# Altium PCB AT_32_PCB.PcbDoc
Units mm, origin at the board's own origin, x right, y up, seen from the top; angles counter-clockwise.
Board outline 100 x 100 mm, 2 copper layers (Top Layer, Bottom Layer); 63 components, 54 nets, 231 pads, 0 vias.
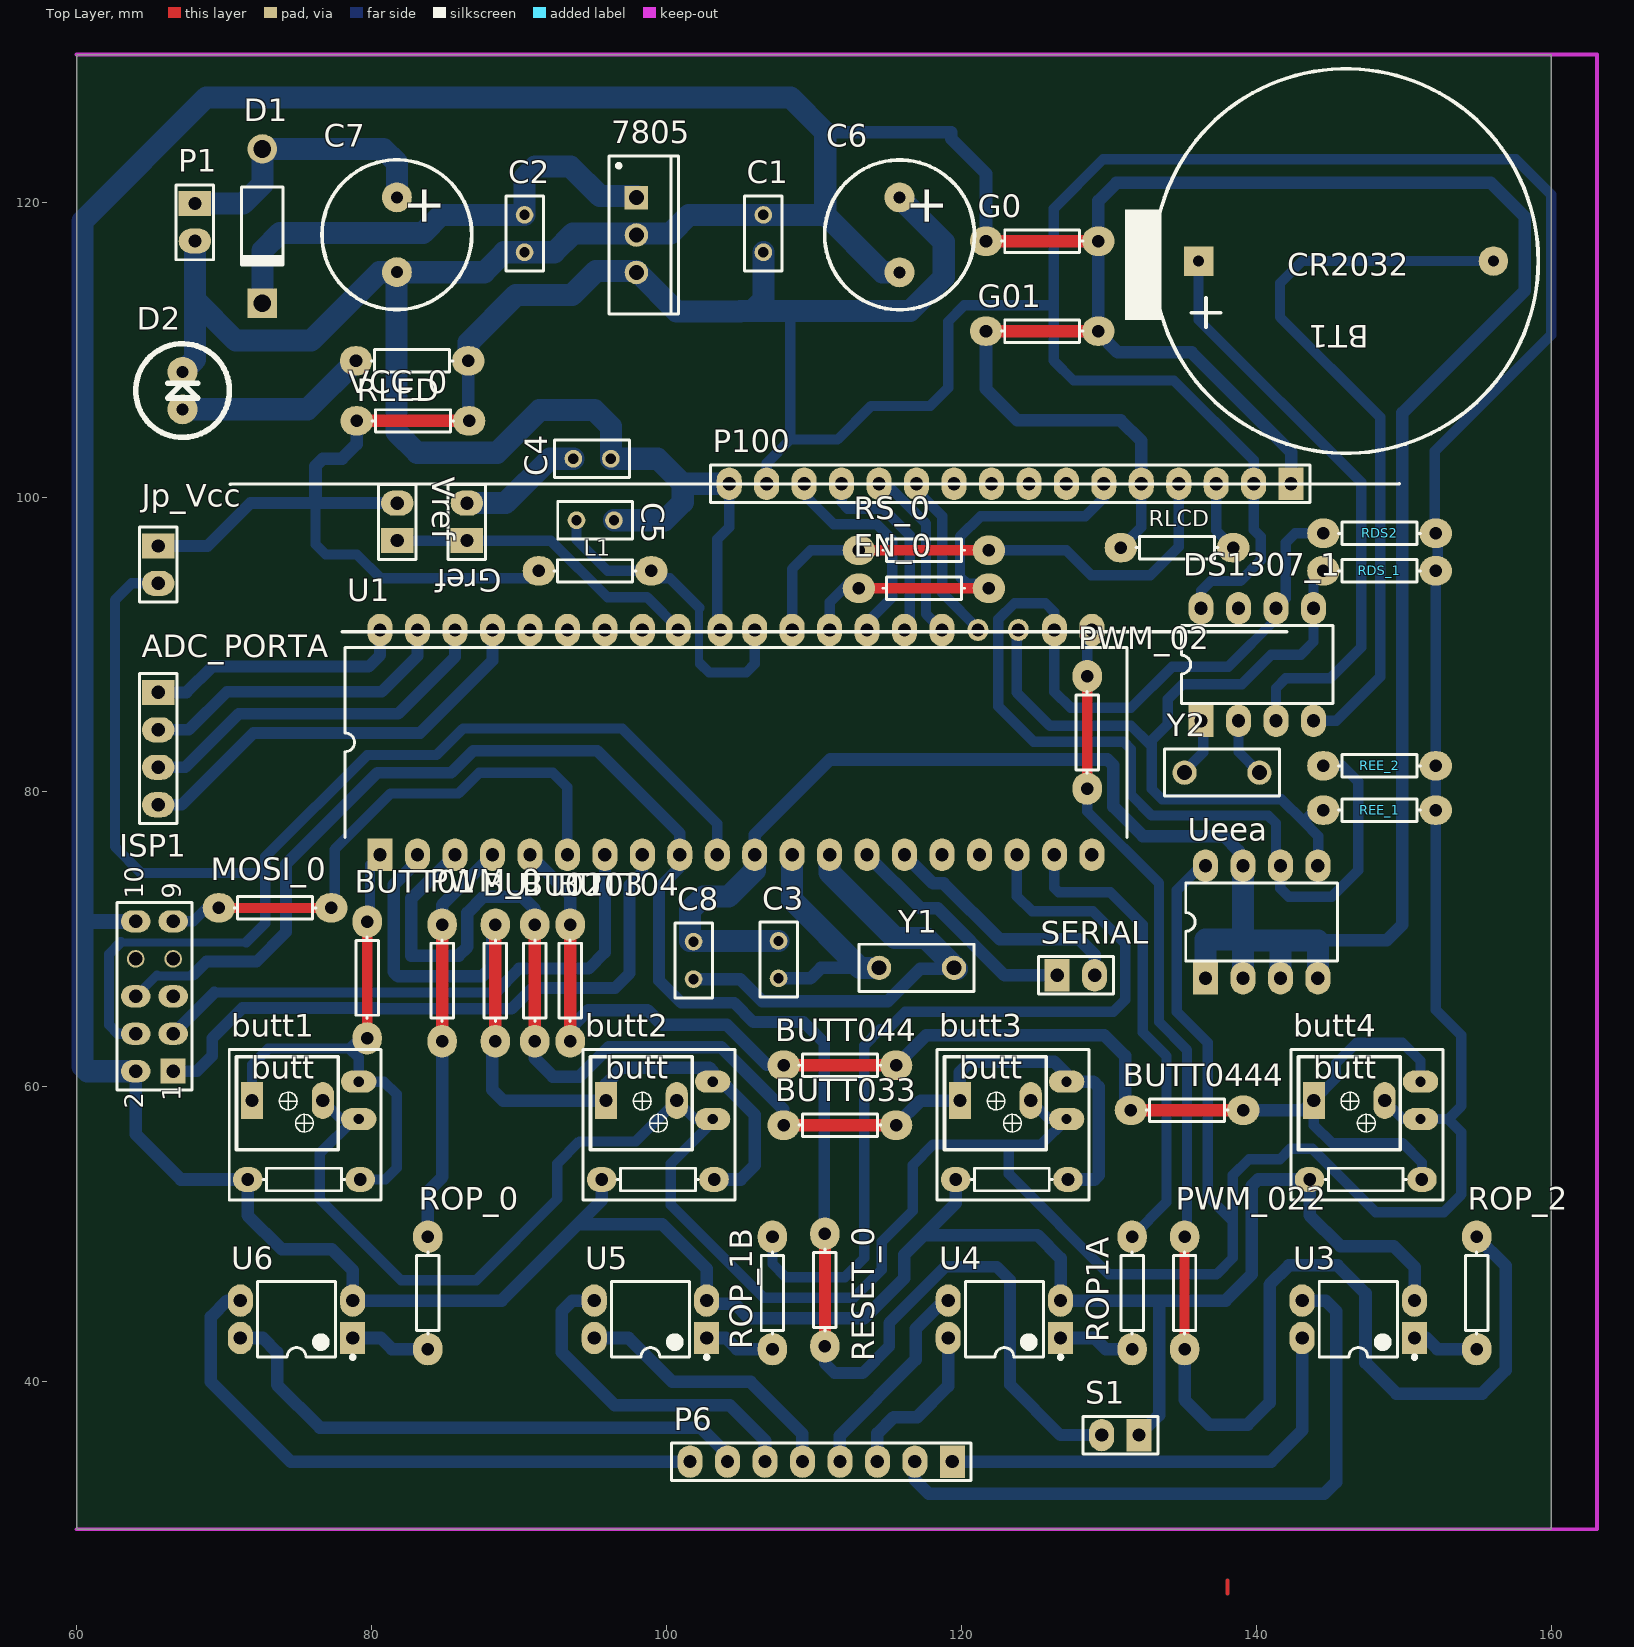
[diagram p0: Top Layer view]
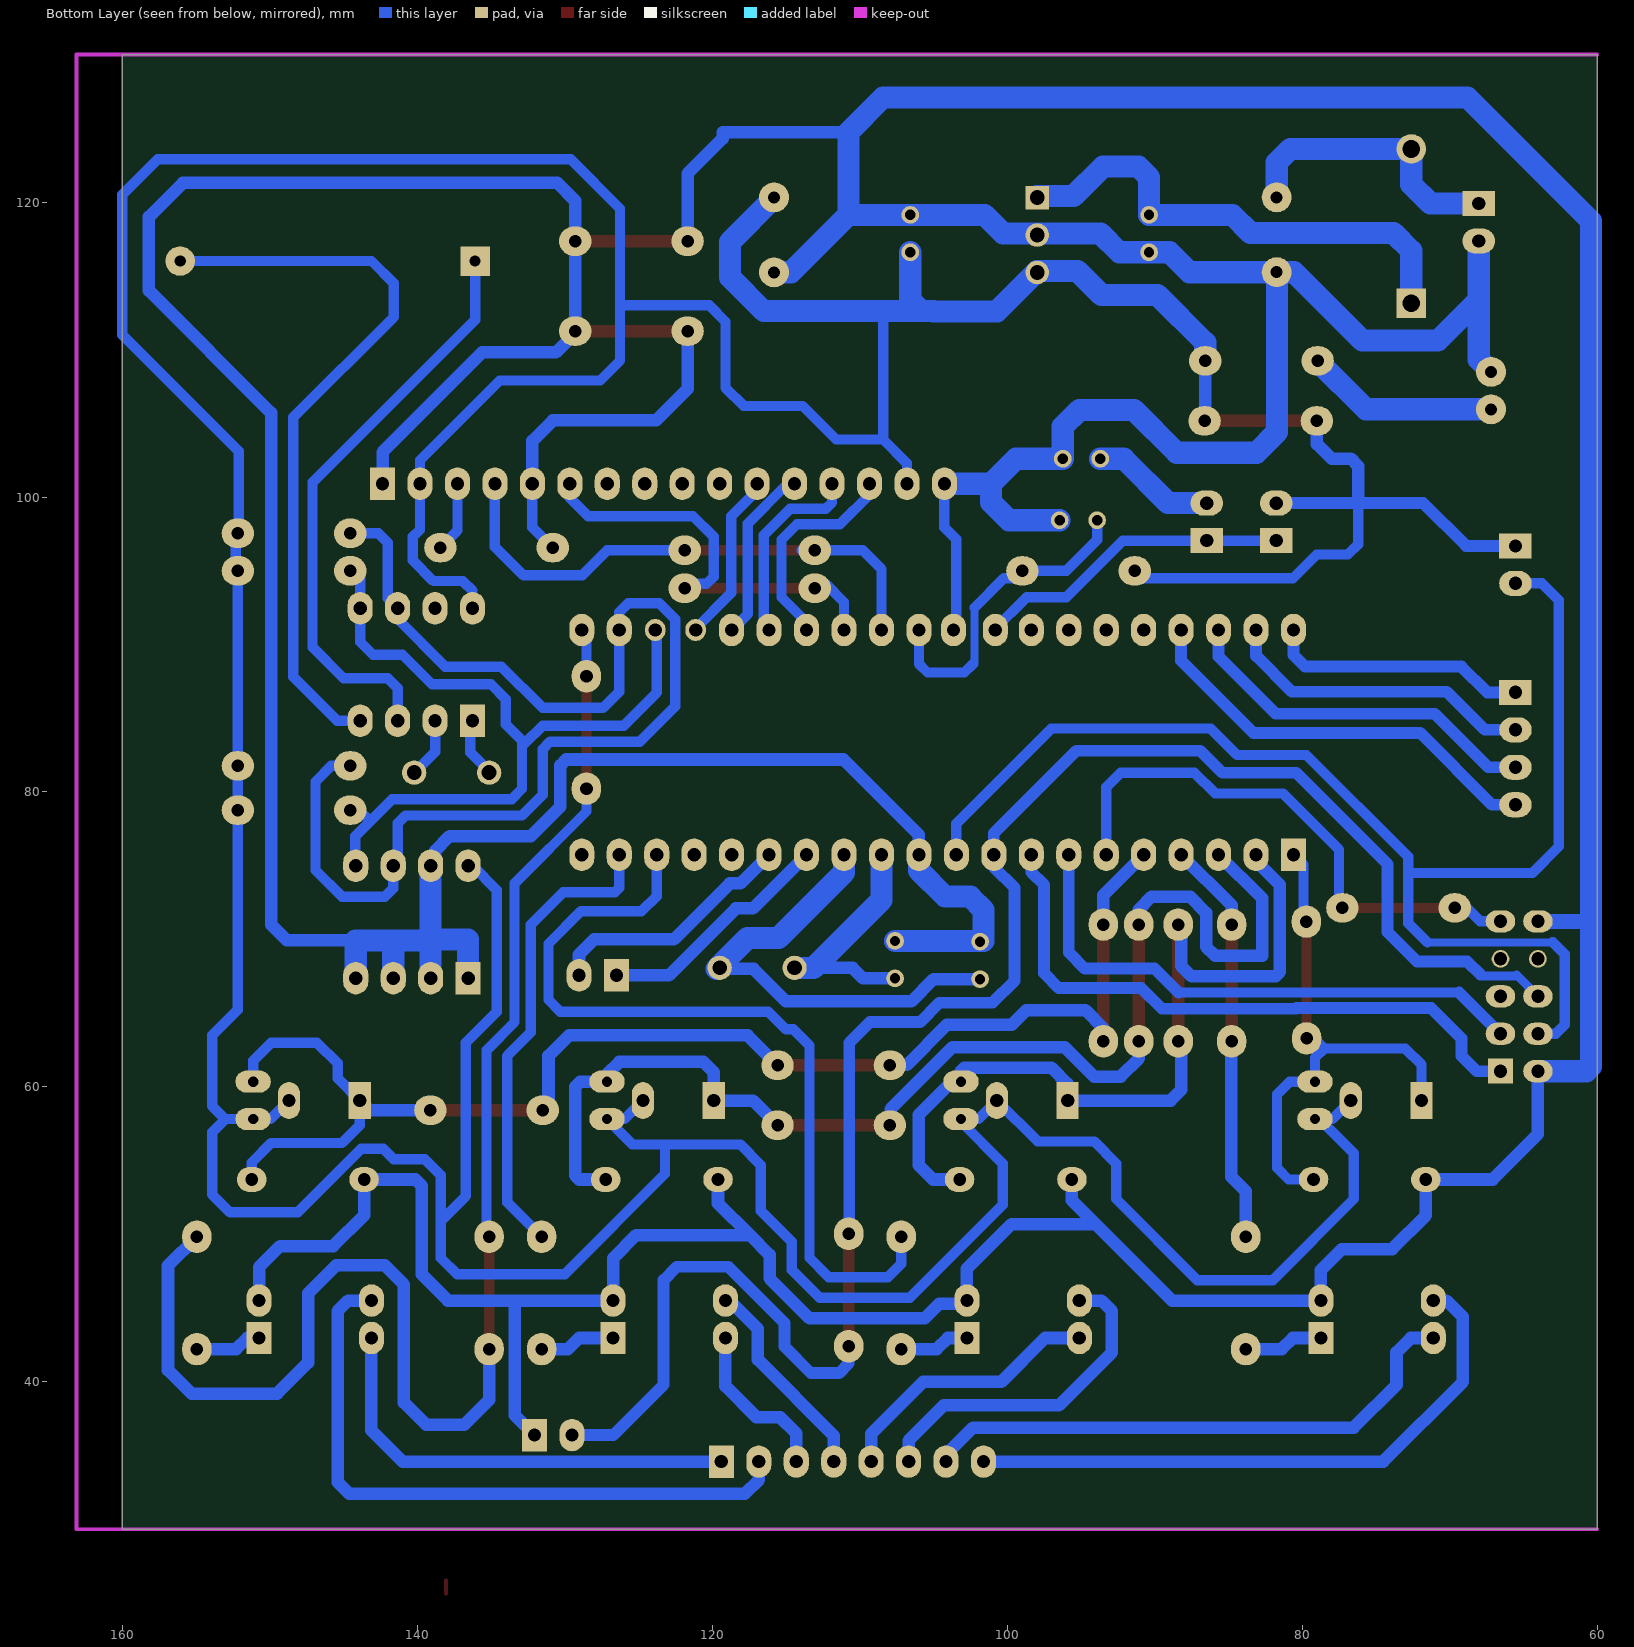
[diagram p1: Bottom Layer view, seen from below]

## Layer stack, top to bottom
Top Layer: signal copper 0.0356
Dielectric: dielectric 0.32, FR-4, Dk 4.8
Bottom Layer: signal copper 0.0356

## Board outline
160,130 160,30 60,30 60,130 160,130

## Design rules (kind name [scope] priority, off if disabled: settings)
Clearance [All] p1: gap=0.254
PolygonConnect [All] p1: connectstyle=Relief reliefconductorwidth=0.254 reliefentries=4 polygonreliefangle="90 Angle"
RoomDefinition AT32 [InComponentClass('AT32')] p1: confinementstyle=ConfineIn formatcopy=TRUE lockcomponents=FALSE outline 161.2,29 173.7,29 173.7,41.1 161.2,41.1
RoutingLayers [All] p1: top layer_v5=FALSE bottom layer_v5=TRUE
RoutingVias [All] p1: holewidth=0.711 width=1.27 viastyle="Through Hole" minholewidth=0.711 minwidth=1.27 maxholewidth=0.711 maxwidth=1.27
SilkscreenOverComponentPads [All] p1: minsilkscreentomaskgap=0.254
SolderMaskExpansion [All] p1: expansion=0.102
Width [All] p1: maxlimit=2 minlimit=0.5 preferedwidth=0.8
26 further rules are at their usual default settings.

## Components (designator, comment, footprint, x,y, rotation, side; value= is the part's Value field where it differs from the comment)
7805 "LM78M05CT" T03B 97.964,117.764 r270 top
ADC_PORTA "Header 4" HDR1X4 65.532,86.752 r270 top
BT1 "Battery" BATT 144.812,115.824 r270 top
butt1 "sch_butt" pcb_butt 58.452,62.04 r0 top
BUTT01 "Res1" AXIAL-0.3#1 79.704,67.4 r90 top
butt2 "sch_butt" pcb_butt 82.452,62.04 r0 top
BUTT02 "Res1" AXIAL-0.3#2 88.4,67.2 r90 top
butt3 "sch_butt" pcb_butt 106.452,62.04 r0 top
BUTT03 "Res1" AXIAL-0.3#2 91.072,67.2 r90 top
butt4 "sch_butt" pcb_butt 130.452,62.04 r0 top
BUTT04 "Res1" AXIAL-0.3#2 93.472,67.2 r90 top
BUTT033 "Res1" AXIAL-0.3#3 111.76,57.404 r180 top
BUTT044 "Res1" AXIAL-0.3#3 111.76,61.468 r180 top
BUTT0444 "Res1" AXIAL-0.3#3 135.3,58.42 r180 top
C1 "Cap" RAD-0.1 106.568,117.864 r270 top
C2 "Cap" RAD-0.1 90.376,117.864 r90 top
C3 "Cap" RAD-0.1 107.6,68.628 r90 top
C4 "Cap" RAD-0.1 94.956,102.596 r0 top
C5 "Cap" RAD-0.1 95.168,98.423 r180 top
C6 "Cap Pol1" C_+ 115.824,117.856 r180 top
C7 "Cap Pol1" C_+ 81.74,117.864 r180 top
C8 "Cap" RAD-0.1 101.836,68.58 r90 top
D1 "Diode 1N4007" DIO10.46-5.3x2.8 72.596,118.372 r270 top
D2 "LED0" LED0 67.24,107.096 r0 top
DS1307_1 "DS1307" DIP8 140.059,88.64 r0 top
EN_0 "Res1" AXIAL-0.3#4 117.456,93.812 r180 top
G0 "Res1" AXIAL-0.3#3 125.476,117.348 r180 top
G01 "Res1" AXIAL-0.3#3 125.476,111.252 r180 top
Gref "Header 2" HDR1X2 86.468,97.044 r90 top
ISP1 "Header 5X2" HDR2X5 66.548,61.064 r90 top
Jp_Vcc "Header 2" HDR1X2 65.532,96.684 r270 top
L1 "Inductor" AXIAL-0.3#3 95.156,94.984 r0 top
MOSI_0 "Res1" AXIAL-0.3#3 73.46,72.136 r180 top
P1 "Header 2" HDR1X2 68.024,119.896 r270 top
P6 "Header 8" HDR1X8 119.38,34.592 r180 top
P100 "Header 16" HDR1X16 142.354,100.9 r180 top
PWM_0 "Res1" AXIAL-0.3#2 84.784,67.2 r90 top
PWM_02 "Res1" AXIAL-0.3#3 128.524,84.036 r90 top
PWM_022 "Res1" AXIAL-0.3#3 135.128,46.028 r90 top
RDS2 "Res1" AXIAL-0.3#3 148.352,97.536 r0 top
RDS_1 "Res1" AXIAL-0.3#3 148.352,94.996 r180 top
REE_1 "Res1" AXIAL-0.3#3 148.352,78.768 r0 top
REE_2 "Res1" AXIAL-0.3#3 148.352,81.768 r0 top
RESET_0 "Res1" AXIAL-0.3#3 110.744,46.228 r90 top
RLCD "Res1" AXIAL-0.3#3 134.62,96.568 r180 top
RLED "Res1" AXIAL-0.3#3 82.756,109.228 r0 top
ROP1A "Res1" AXIAL-0.3#3 131.572,46.028 r270 top
ROP_0 "Res1" AXIAL-0.3#3 83.82,46.028 r270 top
ROP_1B "Res1" AXIAL-0.3#3 107.188,46.028 r270 top
ROP_2 "Res1" AXIAL-0.3#3 154.94,46.028 r90 top
RS_0 "Res1" AXIAL-0.3#4 117.456,96.388 r180 top
S1 "SW-PB" HDR1X2 132.048,36.392 r180 top
SERIAL "Header 2" HDR1X2 126.492,67.564 r0 top
U1 "ATmega32L-8PI" 40P6 104.712,83.36 r0 top
U3 "Optoisolator1" DIP-4 146.914,44.244 r180 top
U4 "Optoisolator1" DIP-4 122.914,44.244 r180 top
U5 "Optoisolator1" DIP-4 98.914,44.244 r180 top
U6 "Optoisolator1" DIP-4 74.914,44.244 r180 top
Ueea "AT17C65-10PC" 8P3 140.359,71.184 r0 top
VCC_0 "Res1" AXIAL-0.3#3 82.804,105.156 r180 top
Vref "Header 2" HDR1X2 81.752,97.044 r90 top
Y1 "XTAL" CAPR5.08-7.8x3.2 116.956,68.072 r0 top
Y2 "XTAL" CAPR5.08-7.8x3.2 137.668,81.312 r0 top

## Footprints (in the part's own frame and the unit in brackets; to place one, negate y for a bottom-side part, rotate by r counter-clockwise, add the part's x,y. Pads: shape width x height; smd on the part's side, far side on the other; paste and mask are expansions set on the pad)
8P3 [mm] "DIP; 8 Leads; Row Spacing 7.62 mm; Pitch 2.54 mm"
  rect 1.7x2.2 hole 0.9: 1(-3.81,-3.81)
  oval 1.7x2.2 hole 0.9: 2(-1.27,-3.81) 3(1.27,-3.81) 4(3.81,-3.81) 5(3.81,3.81) 6(1.27,3.81) 7(-1.27,3.81) 8(-3.81,3.81)
  silkscreen extent -5.15,-2.65 5.15,2.65
40P6 [mm] "DIP; 40 Leads; Row Spacing 15.24 mm; Pitch 2.54 mm"
  rect 1.7x2.2 hole 0.9: 1(-24.13,-7.62)
  oval 1.7x2.2 hole 0.9: 2(-21.59,-7.62) 3(-19.05,-7.62) 4(-16.51,-7.62) 5(-13.97,-7.62) 6(-11.43,-7.62) 7(-8.89,-7.62) 8(-6.35,-7.62) 9(-3.81,-7.62) 10(-1.27,-7.62) 11(1.27,-7.62) 12(3.81,-7.62) 13(6.35,-7.62) 14(8.89,-7.62) 15(11.43,-7.62) 16(13.97,-7.62) 17(16.51,-7.62) 18(19.05,-7.62) 19(21.59,-7.62) 20(24.13,-7.62) 21(24.13,7.62) 22(21.59,7.62) 25(13.97,7.62) 26(11.43,7.62) 27(8.89,7.62) 28(6.35,7.62) 29(3.81,7.62) 30(1.27,7.62) 31(-1.07,7.62) 32(-3.91,7.62) 33(-6.35,7.62) 34(-8.89,7.62) 35(-11.43,7.62) 36(-13.97,7.62) 37(-16.51,7.62) 38(-19.05,7.62) 39(-21.59,7.62) 40(-24.13,7.62)
  oval 1.4x1.5 hole 0.9: 23(19.15,7.62) 24(16.41,7.62)
  silkscreen extent -26.5,-6.45 26.5,6.45
AXIAL-0.3#1 [mm] "Axial Device, Thru-Hole; 2 Leads; 0.3 in Pin Spacing"
  oval 2.2x2 hole 0.85: 1(-4.11,0.004) 2(3.81,0)
  silkscreen extent -2.77,-0.76 2.77,0.76
AXIAL-0.3#2 [mm] "Axial Device, Thru-Hole; 2 Leads; 0.3 in Pin Spacing"
  oval 2.2x2 hole 0.85: 1(-4.11,0) 2(3.81,0)
  silkscreen extent -2.77,-0.76 2.77,0.76
AXIAL-0.3#3 [mm] "Axial Device, Thru-Hole; 2 Leads; 0.3 in Pin Spacing"
  oval 2.2x2 hole 0.85: 1(-3.81,0) 2(3.81,0)
  silkscreen extent -2.77,-0.76 2.77,0.76
AXIAL-0.3#4 [mm] "Axial Device, Thru-Hole; 2 Leads; 0.3 in Pin Spacing"
  oval 2.2x2 hole 0.85: 1(-4.41,0) 2(4.41,0)
  silkscreen extent -2.77,-0.76 2.77,0.76
BATT [mm]
  rect 2x2 hole 0.762: 0(-0.178,-8.735)
  round 2 hole 0.762: 1(-0.178,11.265)
  silkscreen extent -13.21,-13.74 12.86,14.3
C_+ [mil]
  round 80 hole 32: 1(0.79,-96.85) 2(0.79,103.15)
  silkscreen extent -199,-197 201,203
CAPR5.08-7.8x3.2 [mm] "Capacitor, Ceramic, Thru-Hole, Dipped Radial; Body 7.8 x 3.2 mm (WxT) Pin Spacing 5.08 mm (typ)"
  round 1.65 hole 1: 1(-2.54,0) 2(2.54,0)
  silkscreen extent -3.9,-1.6 3.9,1.6
DIO10.46-5.3x2.8 [mm] "Diode, Axial; Body 5.2 x 2.7 mm (LxDia. max), Lead Dia. 0.86 mm (max)"
  round 2 hole 1.2: 1(-5.23,0)
  rect 2x2 hole 1.2: 2(5.23,0)
  silkscreen extent -2.65,-1.4 2.75,1.4
DIP8 [mm] "DIP; 8 Leads; Row Spacing 7.62 mm; Pitch 2.54 mm"
  rect 1.7x2.2 hole 0.9: 1(-3.81,-3.81)
  oval 1.7x2.2 hole 0.9: 2(-1.27,-3.81) 3(1.27,-3.81) 4(3.81,-3.81) 5(3.81,3.81) 6(1.27,3.81) 7(-1.27,3.81) 8(-3.81,3.81)
  silkscreen extent -5.15,-2.65 5.15,2.65
DIP-4 [mm] "DIP; 4 Leads; Row Spacing 7.62 mm; Pitch 2.54 mm"
  rect 1.7x2.2 hole 0.9: 1(-3.81,1.27)
  oval 1.7x2.2 hole 0.9: 2(-3.81,-1.27) 3(3.81,-1.27) 4(3.81,1.27)
  silkscreen extent -3.94,-2.55 2.65,2.69, body extent -3.15,-2.5 3.15,2.5, height 5.6
HDR1X2 [mm] "Connector; Header; 2 Position"
  rect 1.7x2.2 hole 0.9: 1(0,0)
  oval 1.7x2.2 hole 0.9: 2(2.54,0)
  silkscreen extent -1.27,-1.27 3.81,1.27
HDR1X4 [mm] "Connector; Header; 4 Position"
  rect 1.7x2.2 hole 0.9: 1(0,0)
  oval 1.7x2.2 hole 0.9: 2(2.54,0) 3(5.08,0) 4(7.62,0)
  silkscreen extent -1.27,-1.27 8.89,1.27
HDR1X8 [mm] "Connector; Header; 8 Position"
  rect 1.7x2.2 hole 0.9: 1(0,0)
  oval 1.7x2.2 hole 0.9: 2(2.54,0) 3(5.08,0) 4(7.62,0) 5(10.16,0) 6(12.7,0) 7(15.24,0) 8(17.78,0)
  silkscreen extent -1.27,-1.27 19.05,1.27
HDR1X16 [mm] "Connector; Header; 16 Position"
  rect 1.7x2.2 hole 0.9: 1(0,0)
  oval 1.7x2.2 hole 0.9: 2(2.54,0) 3(5.08,0) 4(7.62,0) 5(10.16,0) 6(12.7,0) 7(15.24,0) 8(17.78,0) 9(20.32,0) 10(22.86,0) 11(25.4,0) 12(27.94,0) 13(30.48,0) 14(33.02,0) 15(35.56,0) 16(38.1,0)
  silkscreen extent -1.27,-1.27 39.37,1.27
HDR2X5 [mm] "Connector; Header; 5x2 Position"
  rect 1.7x1.7 hole 0.9: 1(0,0)
  oval 1.5x2 hole 0.9: 2(0,2.54) 3(2.54,0) 4(2.54,2.54) 5(5.08,0) 6(5.08,2.54) 9(10.16,0) 10(10.16,2.54)
  round 1.2 hole 0.9: 7(7.62,0) 8(7.62,2.54)
  silkscreen extent -1.27,-1.27 11.43,3.81
LED0 [mil]
  round 80 hole 32: 1(-2.05,-45.2) 2(-2.05,54.8)
  silkscreen extent -127,-120 123,130
pcb_butt [mm]
  rect 1.5x2.5 hole 0.9: 1(13.446,-2.964)
  oval 1.5x2.5 hole 0.9: 2(18.246,-2.964)
  oval 2.4x1.5 hole 0.7: c1(20.678,-4.222) c2(20.678,-1.682)
  oval 2x1.7 hole 0.85: r1(20.774,-8.318) r2(13.154,-8.318)
  silkscreen extent 11.9,-9.7 22.2,0.5
RAD-0.1 [mm] "Radial Cap, Thru-Hole; 2 Leads; 0.1 in Pin Spacing"
  round 1.2 hole 0.7: 1(-1.27,0) 2(1.27,0)
  silkscreen extent -2.54,-1.27 2.54,1.27
T03B [mm] "TO, Thru-Hole, Vertical, Heatsink Mounted; 3 In-Line Leads; Pitch 2.54 mm"
  rect 1.6x1.6 hole 1: 1(-2.54,0)
  round 1.6 hole 1: 2(0,0) 3(2.54,0)
  silkscreen extent -5.35,-1.85 5.35,2.85, body extent -5.4,-1.9 5.4,2.9, height 19.4

## Part data
7805: "3-Terminal Positive Voltage Regulators"
ADC_PORTA: "Header, 4-Pin"
BT1: library part "Battery holder", "Battery holder CR2032"
BUTT01 BUTT02 BUTT03 BUTT04 BUTT033 BUTT044 BUTT0444 EN_0 G0 G01 MOSI_0 PWM_0 PWM_02 PWM_022 RDS2 RDS_1 REE_1 REE_2 RESET_0 RLCD RLED ROP1A ROP_0 ROP_1B ROP_2 RS_0 VCC_0: "Resistor"
C1 C2 C3 C4 C5 C8: "Capacitor"
C6 C7: "Polarized Capacitor (Radial)"
D1: "1 Amp General Purpose Rectifier"
D2: "Typical INFRARED GaAs LED"
DS1307_1: "64 X 8 Serial Real-Time Clock"
Gref Jp_Vcc P1 SERIAL Vref: "Header, 2-Pin"
ISP1: "Header, 5-Pin, Dual row"
P6: "Header, 8-Pin"
P100: "Header, 16-Pin"
S1: "Switch"
U1: "8-Bit AVR Microcontroller with 32K Bytes of In-System Programmable Flash Memory"
U3 U4 U5 U6: "4-Pin Phototransistor Optocoupler"
Ueea: "FPGA Configuration EEPROM 64K Memory"
Y1 Y2: "Crystal Oscillator"

## Nets (pads, with @x,y where several pads share a name; then routed paths per layer and width w, separated by ;. In a path a pad name is that pad's centre, name@x,y a point inside that pad or via, vN(x,y) a via of type N, cw(c..) or ccw(c..) an arc to the next point about the centre after c; other vN are vias at no path point)
A0: ADC_PORTA.1 U1.40 | length 17.8
  Bottom Layer w0.8: ADC_PORTA.1 67.452,86.752 69.2,88.5 79.8,88.5 80.582,89.282 U1.40
A1: ADC_PORTA.2 U1.39 | length 21.4
  Bottom Layer w0.8: ADC_PORTA.2 67.612,84.212 70.2,86.8 80.7,86.8 83.122,89.222 U1.39
A2: ADC_PORTA.3 U1.38 | length 25.1
  Bottom Layer w0.8: ADC_PORTA.3 67.372,81.672 71,85.3 81.8,85.3 85.662,89.162 U1.38
A3: ADC_PORTA.4 U1.37 | length 28.8
  Bottom Layer w0.8: ADC_PORTA.4 67.132,79.132 72,84 83.3,84 88.202,88.902 U1.37
BUTT1: butt1.1 BUTT01.1 BUTT01.2 butt1.c2 butt1.r1 U1.1 | length 37.4
  Top Layer w0.7: BUTT01.1@79.704,63.59 BUTT01.2
  Bottom Layer w0.7: butt1.1 71.898,61.498 73,62.6 78.5,62.6 ; butt1.r1 80.922,53.722 81.7,54.5 81.7,59.5 80.842,60.358 butt1.c2 79.13,61.97 78.5,62.6 ; BUTT01.1@80.204,63.59 79.49,63.59 78.5,62.6 ; BUTT01.2@80.204,71.21 79.9,71.514 79.9,75.058 U1.1
BUTT2: BUTT02.1 butt2.1 BUTT02.2 butt2.c2 butt2.r1 U1.2 | length 57.7
  Top Layer w0.85: BUTT02.1@88.4,63.39 BUTT02.2
  Bottom Layer w0.85: U1.2 83.122,75.322 81.5,73.7 81.5,67.8 81.8,67.5 87.49,67.5 88.2,68.21 BUTT02.2@88.2,71.01 ; BUTT02.1@88.2,63.39 88.2,59.8 88.924,59.076 butt2.1 95.898,60.198 97,61.3 102.9,61.3 103.13,61.07 butt2.c2 103.742,60.358 106,58.1 106,54.7 105.022,53.722 butt2.r1
BUTT3: BUTT03.1 butt3.1 BUTT03.2 butt3.c2 butt3.r1 BUTT033.1 BUTT033.2 U1.3 | length 84.2
  Top Layer w0.85: BUTT03.1@91.072,63.39 BUTT03.2 ; BUTT033.2 BUTT033.1
  Bottom Layer w0.85: U1.3 82.7,72.778 82.7,68.9 85.9,68.9 86.5,69.5 86.5,71.8 87.6,72.9 90.2,72.9 91.072,72.028 BUTT03.2 ; BUTT03.1@91.072,63.39 91.072,61.928 92.3,60.7 94.1,60.7 96.1,62.7 103.7,62.7 107.9,58.5 107.9,58 BUTT033.2@108.2,57.7 ; BUTT033.1 117.242,59.076 butt3.1 119.898,60.998 120.6,61.7 126.3,61.7 127.13,60.87 butt3.c2 128.942,60.358 129.3,60 129.3,54 129.022,53.722 butt3.r1
BUTT4: butt4.1 BUTT04.1 BUTT04.2 butt4.c2 butt4.r1 BUTT044.1 BUTT044.2 BUTT0444.1 BUTT0444.2 U1.5 | length 93.9
  Top Layer w0.85: BUTT04.1@93.472,63.39 BUTT04.2 ; BUTT044.2 BUTT044.1 ; BUTT0444.2 BUTT0444.1
  Bottom Layer w0.7: butt4.c2 151.13,61.77 149.9,63 146.8,63 145.4,61.6 145.4,60.578 butt4.1 143.898,57.402 145.1,56.2 149.9,56.2 151.226,54.874 butt4.r1
  Bottom Layer w0.85: U1.5 93.472,73.01 BUTT04.2 ; BUTT04.1@93.472,63.39 93.472,63.972 94.7,65.2 98.7,65.2 99.7,64.2 104.1,64.2 106.8,61.5 BUTT044.2@107.8,61.5 ; BUTT044.1 117.602,63.5 129.7,63.5 131.1,62.1 BUTT0444.2@131.1,58.42 ; BUTT0444.1 143.242,58.42 butt4.1
D1: P100.11 U1.24 | length 11.7
  Bottom Layer w0.7: P100.11 116.954,100.446 118.7,98.7 118.7,93.502 U1.24@121.222,90.98
D2: P100.12 U1.25 | length 12.3
  Bottom Layer w0.7: P100.12 114.882,100.9 114.7,100.718 115.064,100.718 117.6,98.182 117.6,92.062 U1.25
D3: P100.13 U1.26 | length 13.4
  Bottom Layer w0.7: P100.13 111.874,99.626 112.3,99.2 114.7,99.2 116.5,97.4 116.5,91.6 116.142,91.242 U1.26
D4: P100.14 U1.27 | length 15
  Bottom Layer w0.7: P100.14 109.334,100.166 111.35,98.15 114.25,98.15 115.3,97.1 115.3,93.2 113.98,91.88 113.98,90.98 U1.27
EN: EN_0.1 EN_0.2 P100.6 U1.28 | length 28.5
  Top Layer w0.7: EN_0.2@113.946,93.812 EN_0.1@121.566,93.812
  Bottom Layer w0.7: U1.28 111.062,92.862 112.312,94.112 EN_0.2@113.2,94.112 ; EN_0.1@121.566,94.112 120.388,94.112 119.9,94.6 119.9,97.3 121.3,98.7 128.4,98.7 129.654,99.954 P100.6
GND: 7805.2 butt1.r2 butt2.r2 butt3.r2 butt4.r2 C1.1 C2.1 C3.2 C4.2 C5.1 C6.2 C7.2 C8.2 D2.2 G0.1 G0.2 G01.1 G01.2 ISP1.2 ISP1.10 P1.2 P100.1 P100.5 P100.16 RLCD.2 S1.1 U1.11 U1.31 U3.2 U4.2 U5.2 U6.2 Ueea.1 Ueea.2 Ueea.3 Ueea.4 Ueea.7 | length 637
  Top Layer w0.85: G01.2 G01.1 ; G0.2 G0.1
  Bottom Layer w0.7: U1.31@103.442,90.98 103.442,97.142 104.254,97.954 P100.16 ; RLCD.2 132.194,97.952 P100.5
  Bottom Layer w0.85: ISP1.2 64.008,56.792 67.078,53.722 butt1.r2 71.606,51.294 73.9,49 77.3,49 78.724,47.576 U6.2 88.814,45.514 94,50.7 ; butt2.r2 95.606,52.306 94,50.7 ; U5.2 102.724,46.9 ; U1.11 105.982,77.082 111.1,82.2 129.9,82.2 130.3,81.8 130.3,79 132.3,77 137.8,77 138.789,76.011 Ueea.7@138.789,74.994 ; 110.766,124.734 119.3,124.734 119.3,124.3 121.666,121.934 G0.2 ; butt3.r2 119.606,52.106 117.45,49.95 ; G01.2 121.666,107.334 123.8,105.2 130.8,105.2 132.194,103.806 P100.5 ; S1.1 133.4,37.744 133.4,45.514 ; P100.1 142.354,103.046 135.6,109.8 130.6,109.8 129.286,111.114 G0.1 129.286,120.086 130.5,121.3 155.9,121.3 158.2,119 158.2,114 149.9,105.7 149.9,71 148.831,69.931 143.869,69.931 ; U3.2 150.724,47.776 149.3,49.2 145.7,49.2 143.606,51.294 butt4.r2 140.122,53.722 139.7,53.3 139.7,47.3 137.914,45.514 133.4,45.514 ; 94,50.7 99.7,50.7 102.724,47.676 102.724,46.9 ; 102.724,46.9 102.724,45.576 103,45.3 104.6,45.3 105.6,44.3 113.4,44.3 116.112,47.012 116.112,48.612 117.45,49.95 ; 117.45,49.95 125.15,49.95 126.724,48.376 U4.2 133.4,45.514
  Bottom Layer w1: 60.4,71.224 ISP1.10
  Bottom Layer w1.5: ISP1.2 60.736,61.064 60.4,61.4 60.4,71.224 60.4,118.7 68.8,127.1 108.4,127.1 110.766,124.734 110.766,119.134 ; D2.2 68.024,109.324 68.024,113.376 ; P1.2 68.024,113.376 ; C7.2@81.7,114.7 81.7,104.4 83.1,103 88.5,103 91.4,105.9 95.1,105.9 96.226,104.774 C4.2 99.404,102.596 101.1,100.9 ; C5.1 99.877,98.423 101.1,99.646 101.1,100.9 ; P100.16 101.1,100.9 ; U1.11 105.982,74.682 104.2,72.9 102.5,72.9 101.6,72 101.6,69.898 C3.2@107.588,69.898 ; C6.2@115.692,115.244 114.656,115.244 110.766,119.134 ; Ueea.1 136.549,70 138.789,70 138.858,69.931 143.869,69.931 ; Ueea.2 Ueea.7 ; Ueea.3 141.629,69.931 ; Ueea.4 144.169,69.931 ; 68.024,113.376 70.8,110.6 75.9,110.6 80.544,115.244 87.644,115.244 88.994,116.594 C2.1 92.394,116.594 93.664,117.864 100.264,117.864 101.534,119.134 C1.1 110.766,119.134
MICO: ISP1.3 U1.7 | length 38.2
  Bottom Layer w0.7: 69.342,66.398 88.376,66.398
  Bottom Layer w0.8: ISP1.3 69.342,66.398 ; 88.376,66.398 90,68.022 94.722,68.022 95.822,69.122 U1.7
MOSI: ISP1.9 MOSI_0.1 MOSI_0.2 U1.6 | length 38.4
  Top Layer w0.7: MOSI_0.2@69.85,72.136 MOSI_0.1@77.47,72.136
  Bottom Layer w0.7: ISP1.9 67.924,71.224 68.836,72.136 MOSI_0.2@69.85,72.136 ; MOSI_0.1@77.5,71.9 77.5,76.1 81.3,79.9 85.9,79.9 87.3,81.3 92.3,81.3 93.282,80.318 U1.6
Net7805_1: 7805.1 C2.2 D1.2 | length 33.6
  Bottom Layer w1.5: D1.2 72.596,116.696 73.8,117.9 83.5,117.9 84.734,119.134 C2.2 90.376,121.676 91.1,122.4 93.5,122.4 95.496,120.404 7805.1@97.964,120.404
NetBT1_0: BT1.0 DS1307_1.3 | length 45.8
  Bottom Layer w0.7: BT1.0 136.077,112.023 147.1,101 ; DS1307_1.3 141.329,87.029 142,87.7 145,87.7 147.1,89.8 147.1,101 ; 142.9,105.2 147.1,101
NetBT1_1: BT1.1 DS1307_1.4 | length 50.4
  Bottom Layer w0.7: DS1307_1.4 145.43,84.83 148.4,87.8 148.4,102.1 148.4,105.4 141.6,112.2 141.6,114.5 143.102,116.002 BT1.1
NetC4_1: C4.1 Gref.2 | length 8.5
  Bottom Layer w1.5: Gref.2 89.084,99.584 92.096,102.596 C4.1
NetC5_2: C5.2 L1.2 U1.30 | length 21.8
  Bottom Layer w0.55: 102.213,92.487 102.213,88.787 102.3,88.7
  Bottom Layer w0.7: C5.2 93.898,97.102 96,95 98.45,95 98.966,94.484 100.216,94.484 102.213,92.487 ; 102.3,88.7 102.9,88.1 105.4,88.1 105.982,88.682 U1.30
NetC7_1: C7.1 D1.1 P1.1 | length 19.4
  Bottom Layer w1.5: P1.1 71.296,119.896 72.596,121.196 D1.1 80.798,123.602 81.72,122.68 C7.1
NetD2_1: D2.1 RLED.1 | length 13.1
  Bottom Layer w1.5: D2.1 75.666,105.948 RLED.1
NetDS1307_1_1: DS1307_1.1 Y2.1 | length 4.1
  Bottom Layer w0.7: Y2.1@135.07,81.37 136.4,82.7 136.4,84.679 DS1307_1.1
NetDS1307_1_2: DS1307_1.2 Y2.2 | length 4.1
  Bottom Layer w0.7: DS1307_1.2 138.789,82.711 Y2.2@140.198,81.302
NetGref_1: Gref.1 U1.32 Vref.1 | length 21.7
  Bottom Layer w0.7: Vref.1 Gref.1 92.156,97.044 96,93.2 98.682,93.2 U1.32@100.902,90.98
NetP6_1: P6.1 U3.4 | length 30.9
  Bottom Layer w0.85: P6.1 140.992,34.592 143.104,36.704 U3.4
NetP6_2: P6.2 U3.3 | length 44.7
  Bottom Layer w0.85: P6.2 116.84,33.36 117.8,32.4 144.6,32.4 145.4,33.2 145.4,44.8 144.686,45.514 U3.3
NetP6_3: P6.3 U4.4 | length 11.3
  Bottom Layer w0.85: P6.3 114.3,36.5 115.4,37.6 117,37.6 119.104,39.704 U4.4
NetP6_4: P6.4 U4.3 | length 14.1
  Bottom Layer w0.85: P6.4 111.76,36.36 116.9,41.5 116.9,43.6 118.814,45.514 U4.3
NetP6_5: P6.5 U5.4 | length 18.7
  Bottom Layer w0.85: U5.4 97.426,42.974 100.4,40 105.7,40 109.22,36.48 P6.5
NetP6_6: P6.6 U5.3 | length 23
  Bottom Layer w0.85: U5.3 93.614,45.514 92.9,44.8 92.9,42 96.5,38.4 104.3,38.4 106.68,36.02 P6.6
NetP6_7: P6.7 U6.4 | length 38.1
  Bottom Layer w0.85: U6.4 72.626,42.974 73.6,42 73.6,39.8 76.5,36.9 102.3,36.9 104.14,35.06 P6.7
NetP6_8: P6.8 U6.3 | length 41.6
  Bottom Layer w0.85: U6.3 70.214,45.514 69.1,44.4 69.1,40 74.508,34.592 P6.8
NetP100_3: P100.3 RLCD.1 | length 4.8
  Bottom Layer w0.7: P100.3 137.274,97.724 RLCD.1
NetROP1A_2: ROP1A.2 U4.1 | length 5.2
  Bottom Layer w0.85: U4.1 129.026,42.974 129.782,42.218 ROP1A.2
NetROP_0_2: ROP_0.2 U6.1 | length 5.4
  Bottom Layer w0.85: U6.1 80.626,42.974 81.382,42.218 ROP_0.2
NetROP_1B_2: ROP_1B.2 U5.1 | length 4.8
  Bottom Layer w0.85: U5.1 104.026,42.974 104.782,42.218 ROP_1B.2
NetROP_2_1: ROP_2.1 U3.1 | length 4.5
  Bottom Layer w0.85: U3.1 151.526,42.974 152.282,42.218 ROP_2.1
PWM1A: ROP1A.1 U1.19 | length 32.1
  Bottom Layer w0.7: U1.19 126.302,73.498 126.6,73.2 130.1,73.2 132.3,71 132.3,63.7 133.9,62.1 133.9,52.166 ROP1A.1
PWM1B: ROP_1B.1 U1.18 | length 57.6
  Bottom Layer w0.7: ROP_1B.1 107.188,48.012 108.1,47.1 112.1,47.1 113.4,48.4 113.4,62.8 114.5,63.9 115,63.9 116.2,65.1 130.3,65.1 131.1,65.9 131.1,69.7 128.9,71.9 124.8,71.9 123.762,72.938 U1.18
PWM2: PWM_02.1 PWM_02.2 PWM_022.1 PWM_022.2 ROP_2.2 U1.21 | length 103.5
  Top Layer w0.7: PWM_02.1 PWM_02.2 ; PWM_022.1 PWM_022.2
  Bottom Layer w0.7: PWM_02.1 128.524,78.676 133.4,73.8 133.4,64.4 135.3,62.5 PWM_022.2@135.3,50 ; PWM_02.2 128.524,90.662 U1.21
  Bottom Layer w0.85: PWM_022.1 135.128,38.772 136.8,37.1 139.4,37.1 140.9,38.6 140.9,46.6 142.2,47.9 145.5,47.9 147.4,46 147.4,41.3 149.5,39.2 155.3,39.2 156.9,40.8 156.9,47.878 ROP_2.2
PWMO: PWM_0.1 PWM_0.2 ROP_0.1 U1.4 | length 27.7
  Top Layer w0.85: PWM_0.1@84.784,63.39 PWM_0.2
  Bottom Layer w0.85: ROP_0.1 83.82,52.92 84.8,53.9 84.8,63.374 PWM_0.1@84.784,63.39 ; PWM_0.2 84.784,72.322 U1.4
RESET: ISP1.6 RESET_0.1 RESET_0.2 S1.2 U1.9 | length 126
  Top Layer w0.8: RESET_0.1 RESET_0.2
  Bottom Layer w0.6: ISP1.6 65.464,67.6 65.534,67.53 67.83,67.53 67.88,67.58
  Bottom Layer w0.7: 67.88,67.58 67.9,67.6
  Bottom Layer w0.8: 67.9,67.6 68.8,68.5 72.2,68.5 74.2,70.5 74.2,75.1 80.4,81.3 85.4,81.3 86.9,82.8 95.3,82.8 100.902,77.198 U1.9 100.902,74.902 99.5,73.5 99.5,67.2 101,65.7 104.6,65.7 105.9,64.4 109.3,64.4 110.7,63 RESET_0.2@110.7,50.038 ; RESET_0.1 110.744,41.256 111.4,40.6 113.3,40.6 115.1,42.4 115.1,44 118.9,47.8 122.4,47.8 123.3,46.9 123.3,39.8 126.708,36.392 S1.2
RS: P100.4 RS_0.1 RS_0.2 U1.29 | length 36.6
  Top Layer w0.7: RS_0.2@113.946,96.388 RS_0.1@121.566,96.388
  Bottom Layer w0.7: U1.29 108.522,95.122 109.788,96.388 RS_0.2@113.946,96.388 ; RS_0.1@121.566,96.388 127.112,96.388 128.8,94.7 132.8,94.7 134.734,96.634 P100.4
RXD: SERIAL.1 U1.14 | length 16.3
  Bottom Layer w0.85: U1.14 117.242,72.1 118.4,72.1 122.936,67.564 SERIAL.1
SCK: ISP1.1 U1.8 | length 42.8
  Bottom Layer w0.8: ISP1.1 68.164,61.064 69.2,62.1 69.2,63.3 71.244,65.344 80.389,65.344 80.433,65.3 89.5,65.3 90.9,66.7 96.5,66.7 97.5,67.7 97.5,73.7 98.362,74.562 U1.8
SCL: DS1307_1.6 RDS2.1 REE_2.1 U1.22 Ueea.6 | length 85.4
  Bottom Layer w0.7: Ueea.6@141.329,74.994 141.329,77.871 140.8,78.4 132.9,78.4 131.5,79.8 131.5,82.9 131,83.4 124.9,83.4 122.5,85.8 122.5,91.7 123.6,92.8 125.7,92.8 126.302,92.198 U1.22 126.302,86.798 127.4,85.7 131.5,85.7 134.3,88.5 138.1,88.5 141.329,91.729 DS1307_1.6 142,93.121 142,96.9 142.636,97.536 RDS2.1 ; Ueea.6 141.629,73.471 142.2,72.9 145.1,72.9 146.9,74.7 146.9,80.7 145.832,81.768 REE_2.1
SDA: DS1307_1.5 RDS_1.2 REE_1.1 U1.23 Ueea.5 | length 54
  Bottom Layer w0.7: U1.23@123.762,90.98 123.762,86.738 126,84.5 131.5,84.5 132.7,83.3 ; RDS_1.2@144.018,94.996 143.869,94.847 DS1307_1.5 143.869,90.169 143,89.3 141,89.3 139,87.3 135,87.3 134,86.3 134,84.6 132.7,83.3 ; Ueea.5@144.2,75.1 144.2,77 143.2,78 ; REE_1.1 143.968,78.768 143.2,78 ; 132.7,83.3 132.9,83.3 132.9,80.2 133.6,79.5 141.7,79.5 143.2,78
TXD: SERIAL.2 U1.15 | length 17.1
  Bottom Layer w0.85: U1.15 118.082,73.8 118.8,73.8 122.6,70 128,70 129.032,68.968 SERIAL.2
VCC: 7805.3 butt1.2 butt1.c1 butt2.2 butt2.c1 butt3.2 butt3.c1 butt4.2 butt4.c1 C1.2 C6.1 DS1307_1.8 Jp_Vcc.1 L1.1 P100.2 P100.15 RDS2.2 RDS_1.1 REE_1.2 REE_2.2 RLED.2 Ueea.8 VCC_0.1 VCC_0.2 Vref.2 | length 459.9
  Top Layer w0.85: VCC_0.2 VCC_0.1
  Bottom Layer w0.7: 76.2,99.584 76.2,96.8 76.9,96.1 79,96.1 80.616,94.484 L1.1@91.346,94.484 ; butt1.2 77.956,57.818 butt1.c1@78.818,57.818 ; butt1.c1 butt1.c1@78.818,57.818 ; P100.15 106.794,102.294 108.4,103.9 ; 108.4,112.5 108.4,103.9 ; butt3.2 125.956,57.818 butt3.c1 125.412,56.1 123.2,56.1 ; Ueea.8@136.249,74.994 134.6,73.345 134.6,65.1 136.7,63 136.7,52.6 138.4,50.9 ; DS1307_1.8 136.249,93.649 136.9,94.3 138.9,94.3 140.3,95.7 140.3,97.3 139.814,97.786 P100.2 139.814,102.486 134.4,107.9 127.6,107.9 126.25,109.25 126.25,115.6 ; butt4.2 149.956,57.818 butt4.c1 153.018,57.818 ; RDS_1.1@151.921,95.279 152.3,95.658 152.3,96.874 152.1,97.074 152.1,103.1 160,111 160,120.5 157.6,122.9 129.6,122.9 126.25,119.55 126.25,115.6 ; RDS_1.1 REE_2.2 REE_1.2 152.162,65.238 153.9,63.5 153.9,58.7 153.018,57.818 ; butt1.c1@78.818,57.818 76.5,55.5 76.5,52.4 82,46.9 87.1,46.9 92.6,52.4 92.6,54.8 94.1,56.3 97.922,56.3 butt2.2 101.956,57.818 butt2.c1 103.13,57.63 100.3,54.8 100.3,52 106.6,45.7 112.7,45.7 114.6,47.6 114.6,49.5 116.7,51.6 116.7,54.7 118.1,56.1 123.2,56.1 ; 108.4,103.9 111.6,103.9 113.875,106.175 117.875,106.175 119.1,107.4 119.1,111.9 120.2,113 126.25,113 126.25,115.6 ; 123.2,56.1 123.2,54.1 130,47.3 137.3,47.3 138.4,48.4 138.4,50.9 ; 138.4,50.9 138.4,54 139.5,55.1 141.6,55.1 142.3,55.8 143.8,55.8 148.1,51.5 152.7,51.5 153.9,52.7 153.9,56.936 153.018,57.818
  Bottom Layer w0.8: Jp_Vcc.1 68.884,96.684 71.784,99.584 76.2,99.584 Vref.2
  Bottom Layer w0.85: 76.2,99.584 76.2,102.1 76.7,102.6 78,102.6 78.994,103.594 VCC_0.2 ; RLED.2 86.566,105.204 VCC_0.1
  Bottom Layer w1.5: RLED.2 86.566,110.466 89.8,113.7 93.6,113.7 95.224,115.324 7805.3@97.964,115.324 ; 7805.3@98.014,115.274 100.7,112.588 104.988,112.588 ; 105,112.6 105.8,112.6 ; C1.2 106.568,113.368 105.8,112.6 ; C6.1@115.692,120.324 115.776,120.324 118.8,117.3 118.8,114.9 116.5,112.6 105.8,112.6
VCC_2: ISP1.4 Jp_Vcc.2 U1.10 | length 92.9
  Bottom Layer w0.55: 63,69.8 71.5,69.8
  Bottom Layer w0.7: 63,69.8 62.2,69 62.2,64.2 62.796,63.604 ISP1.4 ; Jp_Vcc.2 63.744,94.144 62.6,93 62.6,76.3 64.4,74.5 72.8,74.5 ; 71.5,69.8 72.8,71.1 72.8,75.6 79.7,82.5 84.4,82.5 86.2,84.3 97,84.3 103.442,77.858 U1.10
XTAL1: C8.1 U1.13 Y1.2 | length 31.9
  Bottom Layer w0.85: C8.1 104.99,67.31 106.5,65.8 115,65.8 117.2,68 Y1.2@119.7,68
  Bottom Layer w1.5: U1.13 111.062,74.538 115.5,70.1 117.6,70.1 Y1.2@119.7,68
XTAL2: C3.1 U1.12 Y1.1 | length 16.7
  Bottom Layer w0.85: C3.1 109.758,67.358 110.472,68.072 113.128,68.072
  Bottom Layer w1.5: U1.12 108.522,72.678 113.128,68.072 Y1.1
pads on no net: DS1307_1.7 ISP1.5 ISP1.7 ISP1.8 P100.7 P100.8 P100.9 P100.10 U1.16 U1.17 U1.20 U1.33 U1.34 U1.35 U1.36
copper on no net: | length 0.9
  Top Layer w0.254: 138.049,25.654 138.049,26.543

## Keep-outs
Keep-Out Layer:
  lines w0.254: 60,30 163.1,30 163.1,130 60,130

## Silkscreen, mask and mechanical layers (free items; w line width, h text height)
Top Overlay:
  lines w0.254: 70.435,100.869 149.691,100.9 ; 78.035,90.871 142.035,90.871
Bottom Solder:
  lines w0.254: 70.4,65.8 149.7,65.831 ; 70.435,65.861 70.435,83.361 ; 70.435,100.869 70.435,83.371 78.035,83.371 ; 78.035,90.871 78.035,83.371 ; 142.035,75.871 78.035,75.871 78.035,83.371 ; 142.091,75.933 142.091,83.433 ; 142.091,90.933 142.091,83.433 ; 149.691,65.933 149.691,83.433 142.091,83.433 ; 149.691,83.443 149.691,100.9

## Text inside footprints (layer, text, board x,y; h text height)
BT1: Top Overlay "CR2032" at 142.077,115.002 h1.52
butt1: Top Overlay "butt" at 71.852,60.54 h1.52
butt2: Top Overlay "butt" at 95.852,60.54 h1.52
butt3: Top Overlay "butt" at 119.852,60.54 h1.52
butt4: Top Overlay "butt" at 143.852,60.54 h1.52
C6: Top Overlay "+" at 116.566,121.205 h2.54 r270
C7: Top Overlay "+" at 82.482,121.213 h2.54 r270
ISP1: Top Overlay "2" at 64.516,58.524 h1.27 r90; Top Overlay "1" at 67.056,59.032 h1.27 r90; Top Overlay "9" at 67.056,72.748 h1.27 r90; Top Overlay "10" at 64.516,72.748 h1.27 r90